# Altium PCB DUTBoard_NO_CAPS.PcbDoc (part 5 of 5)
Units mil, origin at the board's own origin, x right, y up, seen from the top; angles counter-clockwise.
Board outline 5475 x 5475 mil, 4 copper layers (Top Layer, Mid-Layer 1, Mid-Layer 2, Bottom Layer); 57 components, 471 nets, 1641 pads, 1070 vias.
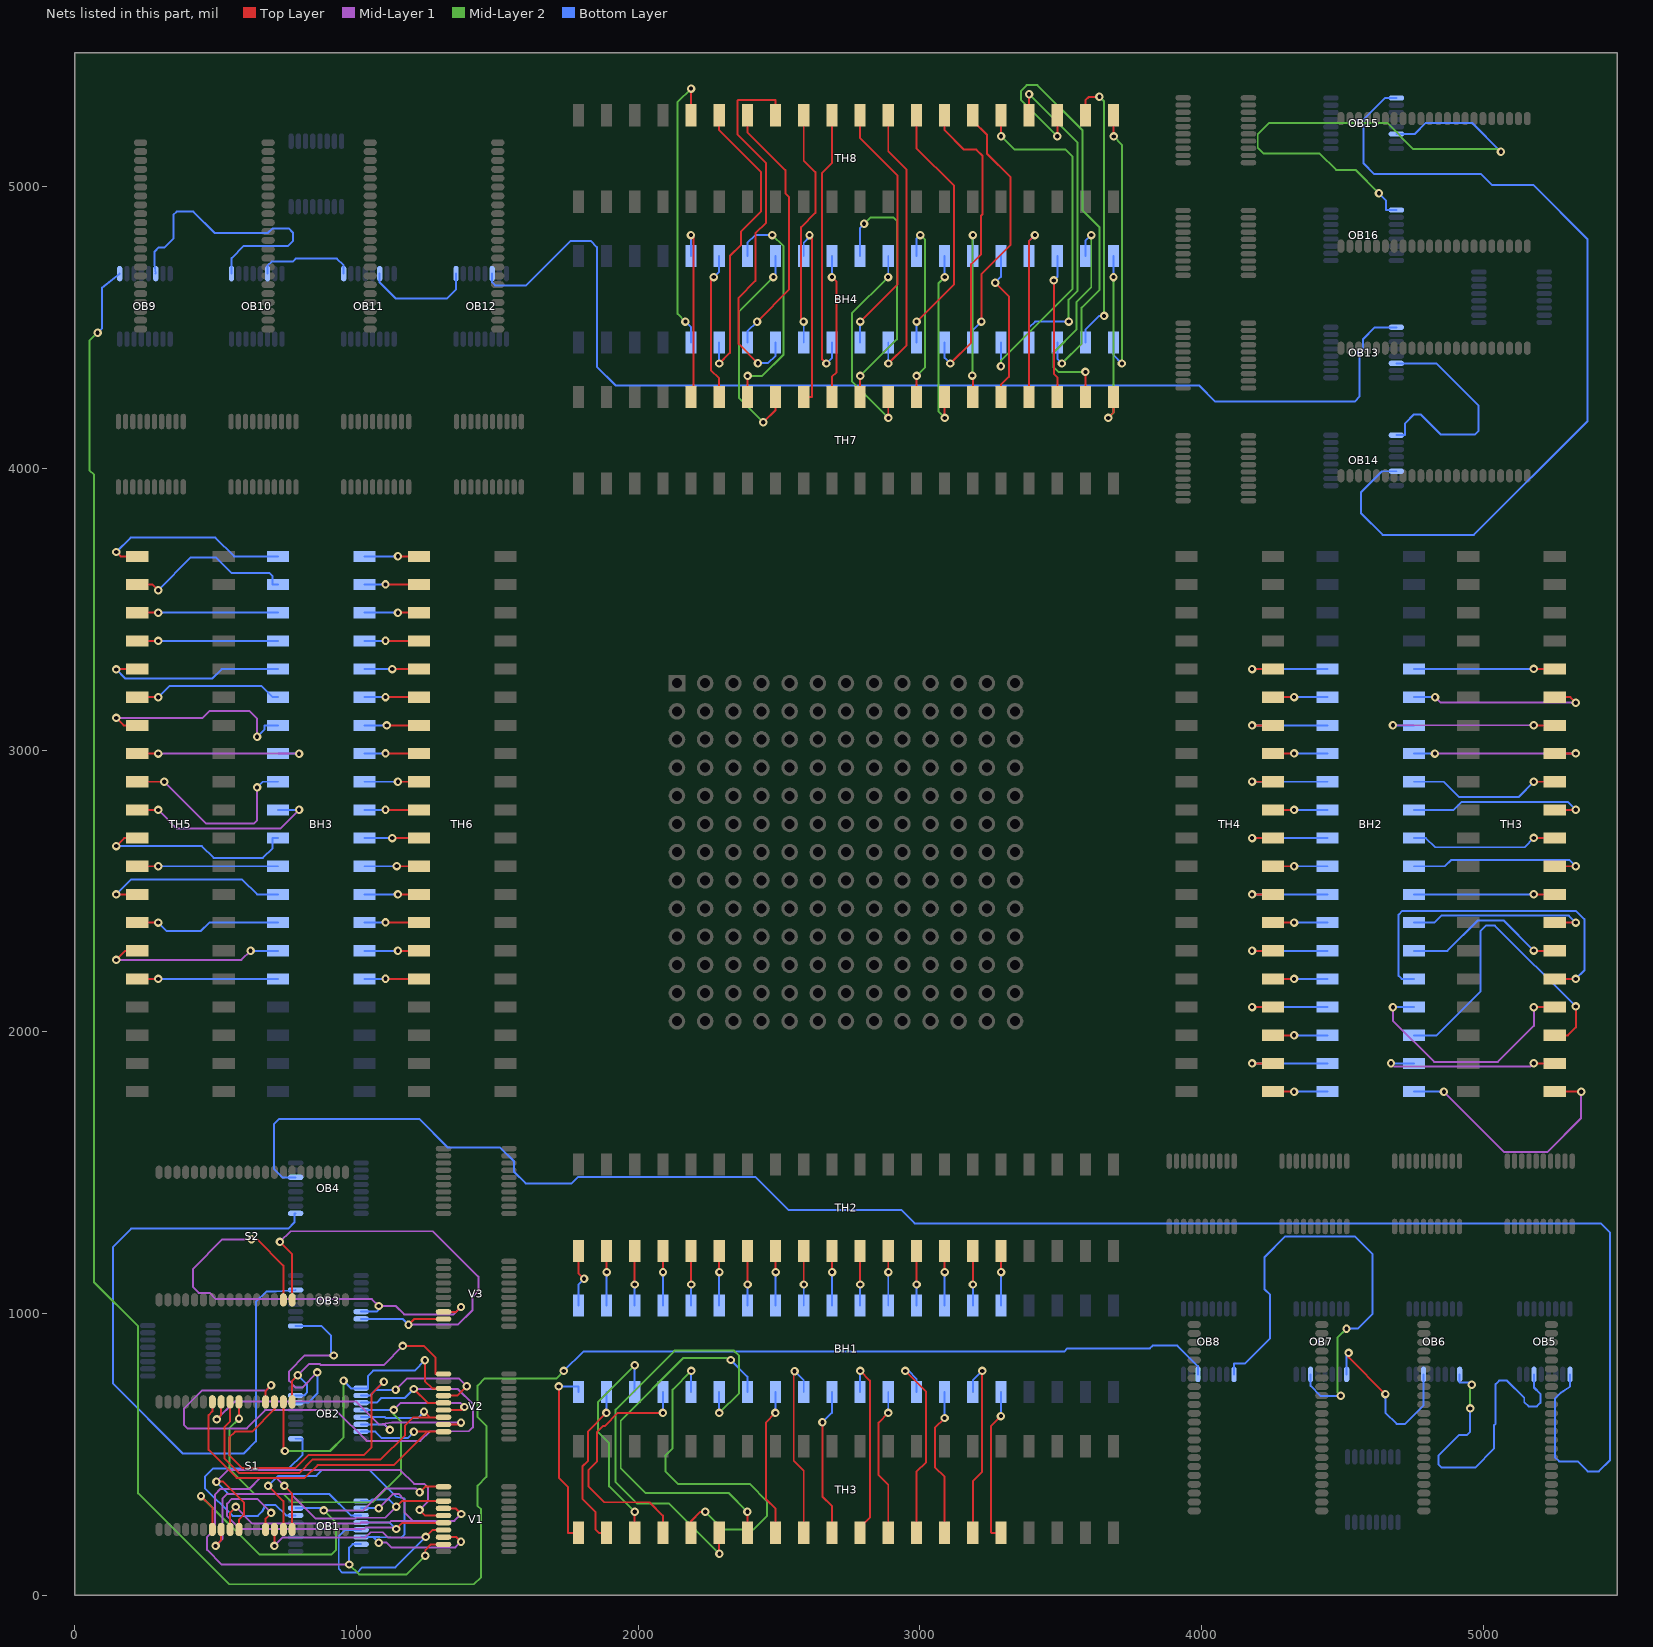
[diagram p7: the nets of this part, all layers, seen from the top]

## Via types
v1: diameter 30, hole 15, Top Layer to Bottom Layer, 1070 vias

## Nets (pads, with @x,y where several pads share a name; then routed paths per layer and width w, separated by ;. In a path a pad name is that pad's centre, name@x,y a point inside that pad or via, vN(x,y) a via of type N, cw(c..) or ccw(c..) an arc to the next point about the centre after c; other vN are vias at no path point) (continued)
OB_D_B110: OB3.D6 S2.DATA14 V3.OVL6 | length 1744.1
  Top Layer w7: v1(627.24,1263) 647.24,1263 740.24,1170 S2.DATA14@740.24,1048.62 ; V3.OVL6@1308.86,1006.02 1354.02,1006.02 v1(1371,1023)
  Mid-Layer 1 w7: v1(627.24,1263) 524,1263 419.77,1158.77 419.77,1093.35 440,1073.12 478.65,1073.12 500.77,1051 1054.32,1051 v1(1078.7,1026.61) 1139.39,1026.61 1169,997 1345,997 v1(1371,1023)
  Bottom Layer w7: OB3.D6@1016.14,1006.61 1071.93,1006.61 1085.32,1020 v1(1078.7,1026.61)
OB_D_B111: OB3.D7 S2.DATA15 V3.OVL7 | length 1716.4
  Top Layer w7: v1(728,1254) 771.73,1210.27 S2.DATA15@771.73,1048.62 ; v1(1184.59,960.43) 1204.59,980.43 V3.OVL7@1308.86,980.43
  Mid-Layer 1 w7: v1(728,1254) 766,1292 1271.2,1292 1432.5,1130.7 1432.5,1079.5 1412,1059 1412,1012.43 1360,960.43 v1(1184.59,960.43)
  Bottom Layer w7: OB3.D7@1016.14,981.02 1144,981.02 ; v1(1184.59,960.43) 1164.59,980.43 ; 1144,981.02 1164.59,980.43 ; 1144,981.02 1144.59,980.43 1164.59,980.43
OB_D_B112: OB2.D0 S1.DATA0 V2.OVL0 | length 862.2
  Top Layer w7: S1.DATA0@771.73,686.38 771.73,761 v1(791.73,781) ; v1(1164,885) 1239.5,885 1280,844.5 1280,785.16 V2.OVL0@1308.86,785.16
  Mid-Layer 1 w7: v1(791.73,781) 830.73,820 869.86,820 872.87,817 1096,817 v1(1164,885)
  Bottom Layer w7: OB2.D0@783.86,708.98 813.98,708.98 825,720 825,747.73 v1(791.73,781)
OB_D_B113: OB2.D1 S1.DATA1 V2.OVL1 | length 1122.9
  Top Layer w7: S1.DATA1@740.24,686.38 740.24,517.76 v1(746,512) ; v1(1243,834) 1243,760 1269.02,733.98 V2.OVL1@1308.86,733.98
  Mid-Layer 2 w7: v1(746,512) 906,512 954,560 v1(954,761)
  Bottom Layer w7: v1(954,761) 980.43,734.57 OB2.D1@1016.14,734.57 1040,734.57 1040,778 1059,797 1206,797 v1(1243,834)
OB_D_B114: OB2.D2 S1.DATA2 V2.OVL2 | length 1644.2
  Top Layer w7: S1.DATA2@708.74,686.38 708.74,660 629.24,580.5 569,580.5 548.5,560 548.5,497.18 594.68,451 782.69,451 829.72,498.03 1027.03,498.03 1053,524 1053,713.5 v1(1097.18,757.68) ; V2.OVL2@1308.86,708.39 1357.39,708.39 v1(1391,742)
  Mid-Layer 1 w7: v1(1138.7,728.98) 1178.7,768.98 1364.02,768.98 v1(1391,742)
  Bottom Layer w7: OB2.D2@1016.14,708.98 1048.47,708.98 1068.47,728.98 ; v1(1097.18,757.68) 1068.47,728.98 ; v1(1138.7,728.98) 1068.47,728.98
OB_D_B115: OB2.D3 S1.DATA3 V2.OVL3 | length 2239.7
  Top Layer w7: S1.DATA3@677.24,686.38 677.24,725.24 v1(697,745) ; v1(1203,732) 1252.2,682.8 V2.OVL3@1308.86,682.8
  Mid-Layer 1 w7: v1(697,745) 679,727 452,727 387,662 387,605 400,592 611,592 676,657 926.78,657 1035.78,548 1227,548 1261,582 1399,582 1413,596 1413,679 1360,732 v1(1203,732)
  Bottom Layer w7: OB2.D3@1016.14,683.39 1071.39,683.39 1088,700 1171,700 v1(1203,732)
OB_D_B116: OB2.D4 S1.DATA4 V2.OVL4 | length 1652.8
  Top Layer w7: S1.DATA4@582.76,686.38 582.76,627.24 v1(583,627) ; V2.OVL4@1308.86,657.2 1372,657.2 v1(1383,668.2)
  Mid-Layer 1 w7: v1(1132,657.8) 1157.2,683 1368.2,683 v1(1383,668.2)
  Mid-Layer 2 w7: v1(583,627) 548.5,592.5 548.5,448.19 638.19,358.5 742.5,358.5 770.97,330.03 1056.83,330.03 1158.5,431.7 1158.5,615.11 1132,641.61 v1(1132,657.8)
  Bottom Layer w7: OB2.D4@1016.14,657.8 v1(1132,657.8)
OB_D_B117: OB2.D5 S1.DATA5 V2.OVL5 | length 1373.5
  Top Layer w7: S1.DATA5@551.26,686.38 551.26,617.26 531,597 531,487 584.5,433.5 796.19,433.5 843.69,481 1085.07,481 1172.3,568.24 1172.3,603.21 1200.7,631.61 1260,631.61 ; v1(1239.61,652) 1260,631.61 ; V2.OVL5@1308.86,631.61 1260,631.61
  Bottom Layer w7: OB2.D5@1016.14,632.2 1100.59,632.2 1103.8,629 1216.61,629 v1(1239.61,652)
OB_D_B118: OB2.D6 S1.DATA6 V2.OVL6 | length 1219.9
  Top Layer w7: v1(504,624) 519.76,639.76 S1.DATA6@519.76,686.38 ; V2.OVL6@1308.86,606.02 1364.02,606.02 v1(1371,613)
  Mid-Layer 1 w7: v1(504,624) 567,687 998.32,687 1078.7,606.61 ; v1(1118.7,586.61) 1098.7,606.61 1078.7,606.61 ; v1(1371,613) 1125.09,613 1078.7,606.61
  Bottom Layer w7: OB2.D6@1016.14,606.61 1098.7,606.61 v1(1118.7,586.61)
OB_D_B119: OB2.D7 S1.DATA7 V2.OVL7 | length 1373.1
  Top Layer w7: S1.DATA7@488.27,686.38 488.27,652.5 475,639.23 475,515.7 574.2,416.5 816.19,416.5 861.69,462 1133,462 1251.43,580.43 ; v1(1204,580) 1204.43,580.43 1251.43,580.43 ; V2.OVL7@1308.86,580.43 1251.43,580.43
  Bottom Layer w7: OB2.D7@1016.14,581.02 1067.29,581.02 1090.31,558 1182,558 v1(1204,580)
OB_D_B120: OB1.D0 S1.DATA8 V1.OVL0 | length 1440.3
  Top Layer w7: v1(448,352) 488.27,311.73 S1.DATA8@488.27,233.62 ; v1(1224,365.16) 1244,385.16 V1.OVL0@1308.86,385.16
  Mid-Layer 1 w7: v1(883.87,301) 1024.57,301 1101.57,378 1211.16,378 v1(1224,365.16)
  Mid-Layer 2 w7: v1(448,352) 656,144 911,144 928,161 928,256.87 v1(883.87,301)
  Bottom Layer w7: OB1.D0@783.86,308.98 821.42,308.98 875.89,308.98 v1(883.87,301)
OB_D_B121: OB1.D1 S1.DATA9 V1.OVL1 | length 1235.8
  Top Layer w7: v1(499.76,175) 519.76,195 S1.DATA9@519.76,233.62 ; v1(1141.16,313.98) 1161.16,333.98 V1.OVL1@1308.86,333.98
  Mid-Layer 1 w7: v1(499.76,175) 524,199.24 524,342.76 540,358.76 767.8,358.76 854.56,272 996.61,272 999.61,275 1102.18,275 v1(1141.16,313.98)
  Bottom Layer w7: OB1.D1@1016.14,334.57 1049.7,334.57 1055.13,340 1115.13,340 v1(1141.16,313.98)
OB_D_B122: OB1.D2 S1.DATA10 V1.OVL2 | length 1269.4
  Top Layer w7: S1.DATA10@551.26,233.62 551.26,293.52 v1(571,313.26) ; V1.OVL2@1308.86,308.39 1351.42,308.39 v1(1371.42,288.39)
  Mid-Layer 1 w7: v1(571,313.26) 630.26,254 1012.61,254 1016.2,257.59 1117.59,257.59 1124,264 1200,264 ; v1(1079,308.98) 1130.02,360 1149.66,360 1170,339.66 1170,294 1200,264 ; v1(1371.42,288.39) 1347.03,264 1200,264
  Bottom Layer w7: OB1.D2@1016.14,308.98 v1(1079,308.98)
OB_D_B123: OB1.D3 S1.DATA11 V1.OVL3 | length 1771.1
  Top Layer w7: v1(502.76,403) 526.5,403 600,329.5 600,285 582.76,267.76 S1.DATA11@582.76,233.62 ; v1(1224,303) 1244.2,282.8 V1.OVL3@1308.86,282.8
  Mid-Layer 1 w7: v1(502.76,403) 543.78,444.03 1155.91,444.03 1204.5,395.43 1240,395.43 1253,382.43 1253,332 v1(1224,303)
  Bottom Layer w7: v1(502.76,403) 546.56,359.19 904.19,359.19 980,283.39 OB1.D3@1016.14,283.39
OB_D_B124: OB1.D4 S1.DATA12 V1.OVL4 | length 1229.2
  Top Layer w7: S1.DATA12@677.24,233.62 677.24,272.24 v1(697,292) ; v1(1141,235) 1163.2,257.2 V1.OVL4@1308.86,257.2
  Mid-Layer 1 w7: v1(697,292) 647.24,341.76 557.76,341.76 541,325 541,281 587,235 1027.61,235 1033.2,240.59 1135.41,240.59 v1(1141,235)
  Bottom Layer w7: OB1.D4@1016.14,257.8 1118.2,257.8 v1(1141,235)
OB_D_B125: OB1.D5 S1.DATA13 V1.OVL5 | length 1268.7
  Top Layer w7: v1(708.74,175) S1.DATA13@708.74,233.62 ; v1(1246,207) 1270.61,231.61 V1.OVL5@1308.86,231.61
  Mid-Layer 1 w7: v1(708.74,175) 738.74,205 1031.41,205 1050,223.59 1092.41,223.59 1111,205 1244,205 v1(1246,207)
  Bottom Layer w7: OB1.D5@1016.14,232.2 960,232.2 937,209.2 937,93.5 950,80.5 1002.63,80.5 1021.14,99 1138,99 v1(1246,207)
OB_D_B126: OB1.D6 S1.DATA14 V1.OVL6 | length 1416.8
  Top Layer w7: v1(686,388) 740.24,333.76 S1.DATA14@740.24,233.62 ; V1.OVL6@1308.86,206.02 1355,206.02 v1(1371,190.02)
  Mid-Layer 1 w7: v1(1078.7,186.61) 1107.39,186.61 1124,170 1350.98,170 v1(1371,190.02)
  Bottom Layer w7: v1(686,388) 722.03,424.03 857.72,424.03 878.69,445 1045.5,445 1139.42,351.08 1171,343 1171,216 1159,204 1082.39,206.61 1058.7,206.61 ; OB1.D6@1016.14,206.61 1053.7,206.61 1058.7,206.61 ; v1(1078.7,186.61) 1058.7,206.61
OB_D_B127: OB1.D7 S1.DATA15 V1.OVL7 | length 1694.6
  Top Layer w7: v1(744,388) 771.73,360.27 S1.DATA15@771.73,233.62 ; v1(1244,140) 1244,160 1264.43,180.43 V1.OVL7@1308.86,180.43
  Mid-Layer 1 w7: v1(744,388) 715,417 658.81,417 618.81,377 517,377 497,357 497,234 470,207 470,161 522,109 v1(974.13,109)
  Mid-Layer 2 w7: v1(974.13,109) 1009.13,74 1178,74 v1(1244,140)
  Bottom Layer w7: v1(974.13,109) 974.13,169 986.16,181.02 OB1.D7@1016.14,181.02
OUTSIDE_L_W0_U_BOTTOM_HEADER_WRP1: BH1.1 TH2.1 | length 209.9
  Top Layer w7: TH2.1@1787.5,1221.46 1787.5,1143.5 v1(1808,1123)
  Bottom Layer w7: BH1.1@1787.5,1028.54 1787.5,1102.5 v1(1808,1123)
OUTSIDE_L_W0_U_BOTTOM_HEADER_WRP2: BH2.1 TH4.1 | length 192.9
  Top Layer w7: TH4.1@4253.54,1787.5 v1(4328,1787.5)
  Bottom Layer w7: v1(4328,1787.5) BH2.1@4446.46,1787.5
OUTSIDE_L_W0_U_BOTTOM_HEADER_WRP3: BH3.1 TH6.1 | length 193.3
  Top Layer w7: v1(1147,3688) 1147.5,3687.5 TH6.1@1221.46,3687.5
  Bottom Layer w7: BH3.1@1028.54,3687.5 1146.5,3687.5 v1(1147,3688)
OUTSIDE_L_W0_U_BOTTOM_HEADER_WRP4: BH4.1 TH8.1 | length 980.4
  Top Layer w7: v1(3687.5,5178) TH8.1@3687.5,5253.54
  Mid-Layer 2 w7: v1(3687.5,5178) 3717,5148.5 v1(3717,4372)
  Bottom Layer w7: BH4.1@3687.5,4446.46 3687.5,4401.5 v1(3717,4372)
OUTSIDE_L_W1_U_BOTTOM_HEADER_WRP1: BH1.2 TH2.2 | length 193.3
  Top Layer w7: TH2.2@1887.5,1221.46 1887.5,1147.5 v1(1888,1147)
  Bottom Layer w7: BH1.2@1887.5,1028.54 1887.5,1146.5 v1(1888,1147)
OUTSIDE_L_W1_U_BOTTOM_HEADER_WRP2: BH2.2 TH4.2 | length 342
  Top Layer w7: v1(4179,1887.5) TH4.2@4253.54,1887.5
  Bottom Layer w7: v1(4179,1887.5) BH2.2@4446.46,1887.5
OUTSIDE_L_W1_U_BOTTOM_HEADER_WRP3: BH3.2 TH6.2 | length 193.3
  Top Layer w7: v1(1103,3588) 1103.5,3587.5 TH6.2@1221.46,3587.5
  Bottom Layer w7: BH3.2@1028.54,3587.5 1102.5,3587.5 v1(1103,3588)
OUTSIDE_L_W1_U_BOTTOM_HEADER_WRP4: BH4.2 TH8.2 | length 1023
  Top Layer w7: TH8.2@3587.5,5253.54 3587.5,5306 3600,5318.5 v1(3637,5318.5)
  Mid-Layer 2 w7: v1(3637,5318.5) 3653.5,5302 v1(3653.5,4541)
  Bottom Layer w7: BH4.2@3587.5,4446.46 3587.5,4491.5 3637,4541 v1(3653.5,4541)
OUTSIDE_L_W2_U_BOTTOM_HEADER_WRP1: BH1.3 TH2.3 | length 192.9
  Top Layer w7: v1(1987.5,1103) TH2.3@1987.5,1221.46
  Bottom Layer w7: BH1.3@1987.5,1028.54 v1(1987.5,1103)
OUTSIDE_L_W2_U_BOTTOM_HEADER_WRP2: BH2.3 TH4.3 | length 192.9
  Top Layer w7: TH4.3@4253.54,1987.5 v1(4328,1987.5)
  Bottom Layer w7: v1(4328,1987.5) BH2.3@4446.46,1987.5
OUTSIDE_L_W2_U_BOTTOM_HEADER_WRP3: BH3.3 TH6.3 | length 192.9
  Top Layer w7: v1(1147,3487.5) TH6.3@1221.46,3487.5
  Bottom Layer w7: BH3.3@1028.54,3487.5 v1(1147,3487.5)
OUTSIDE_L_W2_U_BOTTOM_HEADER_WRP4: BH4.3 TH8.3 | length 1571
  Top Layer w7: v1(3487.5,5179) TH8.3@3487.5,5253.54
  Mid-Layer 2 w7: v1(3487.5,5179) 3358,5308.5 3358,5339 3379,5360 3417,5360 3577,5200 3577,4916 3636.5,4856.5 3636.5,4632.5 3574,4570 3574,4442 v1(3504,4372)
  Bottom Layer w7: BH4.3@3487.5,4446.46 3487.5,4388.5 v1(3504,4372)
OUTSIDE_L_W3_U_BOTTOM_HEADER_WRP1: BH1.4 TH2.4 | length 193.3
  Top Layer w7: TH2.4@2087.5,1221.46 2087.5,1147.5 v1(2088,1147)
  Bottom Layer w7: BH1.4@2087.5,1028.54 2087.5,1146.5 v1(2088,1147)
OUTSIDE_L_W3_U_BOTTOM_HEADER_WRP2: BH2.4 TH4.4 | length 342
  Top Layer w7: v1(4179,2087.5) TH4.4@4253.54,2087.5
  Bottom Layer w7: v1(4179,2087.5) BH2.4@4446.46,2087.5
OUTSIDE_L_W3_U_BOTTOM_HEADER_WRP3: BH3.4 TH6.4 | length 193.3
  Top Layer w7: v1(1103,3388) 1103.5,3387.5 TH6.4@1221.46,3387.5
  Bottom Layer w7: BH3.4@1028.54,3387.5 1102.5,3387.5 v1(1103,3388)
OUTSIDE_L_W3_U_BOTTOM_HEADER_WRP4: BH4.4 TH8.4 | length 1168.9
  Top Layer w7: TH8.4@3387.5,5253.54 v1(3387.5,5328)
  Mid-Layer 2 w7: v1(3387.5,5328) 3560,5155.5 3560,4630.54 3528,4598.54 v1(3528,4521)
  Bottom Layer w7: BH4.4@3387.5,4446.46 3387.5,4500 3408.5,4521 v1(3528,4521)
OUTSIDE_L_W4_U_BOTTOM_HEADER_WRP1: BH1.5 TH2.5 | length 193.3
  Top Layer w7: TH2.5@2187.5,1221.46 2187.5,1103.5 v1(2188,1103)
  Bottom Layer w7: BH1.5@2187.5,1028.54 2187.5,1102.5 v1(2188,1103)
OUTSIDE_L_W4_U_BOTTOM_HEADER_WRP2: BH2.5 TH4.5 | length 192.9
  Top Layer w7: TH4.5@4253.54,2187.5 v1(4328,2187.5)
  Bottom Layer w7: v1(4328,2187.5) BH2.5@4446.46,2187.5
OUTSIDE_L_W4_U_BOTTOM_HEADER_WRP3: BH3.5 TH6.5 | length 192.9
  Top Layer w7: v1(1127,3287.5) TH6.5@1221.46,3287.5
  Bottom Layer w7: BH3.5@1028.54,3287.5 v1(1127,3287.5)
OUTSIDE_L_W4_U_BOTTOM_HEADER_WRP4: BH4.5 TH8.5 | length 1292
  Top Layer w7: TH8.5@3287.5,5253.54 3287.5,5179.5 v1(3288,5179)
  Mid-Layer 2 w7: v1(3287.5,4362) 3287.5,4382.5 3541,4636 3541,5107 3516,5132 3335,5132 v1(3288,5179)
  Bottom Layer w7: v1(3287.5,4362) BH4.5@3287.5,4446.46
OUTSIDE_L_W5_U_BOTTOM_HEADER_WRP1: BH1.6 TH2.6 | length 193.3
  Top Layer w7: TH2.6@2287.5,1221.46 2287.5,1147.5 v1(2288,1147)
  Bottom Layer w7: BH1.6@2287.5,1028.54 2287.5,1146.5 v1(2288,1147)
OUTSIDE_L_W5_U_BOTTOM_HEADER_WRP2: BH2.6 TH4.6 | length 342
  Top Layer w7: v1(4179,2287.5) TH4.6@4253.54,2287.5
  Bottom Layer w7: v1(4179,2287.5) BH2.6@4446.46,2287.5
OUTSIDE_L_W5_U_BOTTOM_HEADER_WRP3: BH3.6 TH6.6 | length 193.3
  Top Layer w7: v1(1103,3188) 1103.5,3187.5 TH6.6@1221.46,3187.5
  Bottom Layer w7: BH3.6@1028.54,3187.5 1102.5,3187.5 v1(1103,3188)
OUTSIDE_L_W5_U_BOTTOM_HEADER_WRP4: BH4.6 TH8.6 | length 918.5
  Top Layer w7: TH8.6@3187.5,5253.54 3187.5,5234 3238,5183.5 3238,5117 3322,5033 3322,4793.43 3218,4689.43 v1(3218,4521)
  Bottom Layer w7: BH4.6@3187.5,4446.46 3187.5,4490.5 v1(3218,4521)
OUTSIDE_L_W6_U_BOTTOM_HEADER_WRP1: BH1.7 TH2.7 | length 193.3
  Top Layer w7: TH2.7@2387.5,1221.46 2387.5,1103.5 v1(2388,1103)
  Bottom Layer w7: BH1.7@2387.5,1028.54 2387.5,1102.5 v1(2388,1103)
OUTSIDE_L_W6_U_BOTTOM_HEADER_WRP2: BH2.7 TH4.7 | length 192.9
  Top Layer w7: TH4.7@4253.54,2387.5 v1(4328,2387.5)
  Bottom Layer w7: v1(4328,2387.5) BH2.7@4446.46,2387.5
OUTSIDE_L_W6_U_BOTTOM_HEADER_WRP3: BH3.7 TH6.7 | length 192.9
  Top Layer w7: v1(1107,3087.5) TH6.7@1221.46,3087.5
  Bottom Layer w7: BH3.7@1028.54,3087.5 v1(1107,3087.5)
OUTSIDE_L_W6_U_BOTTOM_HEADER_WRP4: BH4.7 TH8.7 | length 1093
  Top Layer w7: TH8.7@3087.5,5253.54 3087.5,5200 3156.37,5131.13 3200,5131.13 3222,5109.13 3222,4902 3217,4897 3217,4760 3181.5,4724.5 3181.5,4446 v1(3107.5,4372)
  Bottom Layer w7: BH4.7@3087.5,4446.46 3087.5,4392 v1(3107.5,4372)
OUTSIDE_L_W7_U_BOTTOM_HEADER_WRP1: BH1.8 TH2.8 | length 193.3
  Top Layer w7: TH2.8@2487.5,1221.46 2487.5,1147.5 v1(2488,1147)
  Bottom Layer w7: BH1.8@2487.5,1028.54 2487.5,1146.5 v1(2488,1147)
OUTSIDE_L_W7_U_BOTTOM_HEADER_WRP2: BH2.8 TH4.8 | length 342
  Top Layer w7: v1(4179,2487.5) TH4.8@4253.54,2487.5
  Bottom Layer w7: v1(4179,2487.5) BH2.8@4446.46,2487.5
OUTSIDE_L_W7_U_BOTTOM_HEADER_WRP3: BH3.8 TH6.8 | length 193.3
  Top Layer w7: v1(1103,2988) 1103.5,2987.5 TH6.8@1221.46,2987.5
  Bottom Layer w7: BH3.8@1028.54,2987.5 1102.5,2987.5 v1(1103,2988)
OUTSIDE_L_W7_U_BOTTOM_HEADER_WRP4: BH4.8 TH8.8 | length 917.7
  Top Layer w7: TH8.8@2987.5,5253.54 2987.5,5136 3121,5002.5 3121,4654 v1(2988,4521)
  Bottom Layer w7: BH4.8@2987.5,4446.46 2987.5,4520.5 v1(2988,4521)
OUTSIDE_L_W8_U_BOTTOM_HEADER_WRP1: BH1.9 TH2.9 | length 193.3
  Top Layer w7: TH2.9@2587.5,1221.46 2587.5,1103.5 v1(2588,1103)
  Bottom Layer w7: BH1.9@2587.5,1028.54 2587.5,1102.5 v1(2588,1103)
OUTSIDE_L_W8_U_BOTTOM_HEADER_WRP2: BH2.9 TH4.9 | length 192.9
  Top Layer w7: TH4.9@4253.54,2587.5 v1(4328,2587.5)
  Bottom Layer w7: v1(4328,2587.5) BH2.9@4446.46,2587.5
OUTSIDE_L_W8_U_BOTTOM_HEADER_WRP3: BH3.9 TH6.9 | length 192.9
  Top Layer w7: v1(1147,2887.5) TH6.9@1221.46,2887.5
  Bottom Layer w7: BH3.9@1028.54,2887.5 v1(1147,2887.5)
OUTSIDE_L_W8_U_BOTTOM_HEADER_WRP4: BH4.9 TH8.9 | length 1010.3
  Top Layer w7: TH8.9@2887.5,5253.54 2887.5,5126 2953,5060.5 2953,4437 v1(2888,4372)
  Bottom Layer w7: BH4.9@2887.5,4446.46 2887.5,4372.5 v1(2888,4372)
OUTSIDE_L_W9_U_BOTTOM_HEADER_WRP1: BH1.10 TH2.10 | length 193.3
  Top Layer w7: TH2.10@2687.5,1221.46 2687.5,1147.5 v1(2688,1147)
  Bottom Layer w7: BH1.10@2687.5,1028.54 2687.5,1146.5 v1(2688,1147)
OUTSIDE_L_W9_U_BOTTOM_HEADER_WRP2: BH2.10 TH4.10 | length 342
  Top Layer w7: v1(4179,2687.5) TH4.10@4253.54,2687.5
  Bottom Layer w7: v1(4179,2687.5) BH2.10@4446.46,2687.5
OUTSIDE_L_W9_U_BOTTOM_HEADER_WRP3: BH3.10 TH6.10 | length 193.3
  Top Layer w7: v1(1103,2788) 1103.5,2787.5 TH6.10@1221.46,2787.5
  Bottom Layer w7: BH3.10@1028.54,2787.5 1102.5,2787.5 v1(1103,2788)
OUTSIDE_L_W9_U_BOTTOM_HEADER_WRP4: BH4.10 TH8.10 | length 917.7
  Top Layer w7: TH8.10@2787.5,5253.54 2787.5,5172 2921,5038.5 2921,4654 v1(2788,4521)
  Bottom Layer w7: BH4.10@2787.5,4446.46 2787.5,4520.5 v1(2788,4521)
OUTSIDE_L_W10_U_BOTTOM_HEADER_WRP1: BH1.11 TH2.11 | length 193.3
  Top Layer w7: TH2.11@2787.5,1221.46 2787.5,1103.5 v1(2788,1103)
  Bottom Layer w7: BH1.11@2787.5,1028.54 2787.5,1102.5 v1(2788,1103)
OUTSIDE_L_W10_U_BOTTOM_HEADER_WRP2: BH2.11 TH4.11 | length 192.9
  Top Layer w7: TH4.11@4253.54,2787.5 v1(4328,2787.5)
  Bottom Layer w7: v1(4328,2787.5) BH2.11@4446.46,2787.5
OUTSIDE_L_W10_U_BOTTOM_HEADER_WRP3: BH3.11 TH6.11 | length 192.9
  Top Layer w7: v1(1127,2687.5) TH6.11@1221.46,2687.5
  Bottom Layer w7: BH3.11@1028.54,2687.5 v1(1127,2687.5)
OUTSIDE_L_W10_U_BOTTOM_HEADER_WRP4: BH4.11 TH8.11 | length 984.6
  Top Layer w7: v1(2668,4372) 2653,4387 2653,5048.5 2687.5,5083 TH8.11@2687.5,5253.54
  Bottom Layer w7: v1(2668,4372) 2687.5,4391.5 BH4.11@2687.5,4446.46
OUTSIDE_L_W11_U_BOTTOM_HEADER_WRP1: BH1.12 TH2.12 | length 193.3
  Top Layer w7: TH2.12@2887.5,1221.46 2887.5,1147.5 v1(2888,1147)
  Bottom Layer w7: BH1.12@2887.5,1028.54 2887.5,1146.5 v1(2888,1147)
OUTSIDE_L_W11_U_BOTTOM_HEADER_WRP2: BH2.12 TH4.12 | length 342.4
  Top Layer w7: v1(4179,2888) 4179.5,2887.5 TH4.12@4253.54,2887.5
  Bottom Layer w7: v1(4179,2888) 4179.5,2887.5 BH2.12@4446.46,2887.5
OUTSIDE_L_W11_U_BOTTOM_HEADER_WRP3: BH3.12 TH6.12 | length 193.3
  Top Layer w7: v1(1143,2588) 1143.5,2587.5 TH6.12@1221.46,2587.5
  Bottom Layer w7: BH3.12@1028.54,2587.5 1142.5,2587.5 v1(1143,2588)
OUTSIDE_L_W11_U_BOTTOM_HEADER_WRP4: BH4.12 TH8.12 | length 849
  Top Layer w7: v1(2587,4521) 2578,4530 2578,4856 2628.64,4906.64 2628.64,5051.36 2587.5,5092.5 TH8.12@2587.5,5253.54
  Bottom Layer w7: v1(2587,4521) 2587.5,4520.5 BH4.12@2587.5,4446.46
OUTSIDE_L_W12_U_BOTTOM_HEADER_WRP1: BH1.13 TH2.13 | length 193.3
  Top Layer w7: TH2.13@2987.5,1221.46 2987.5,1103.5 v1(2988,1103)
  Bottom Layer w7: BH1.13@2987.5,1028.54 2987.5,1102.5 v1(2988,1103)
OUTSIDE_L_W12_U_BOTTOM_HEADER_WRP2: BH2.13 TH4.13 | length 193.3
  Top Layer w7: TH4.13@4253.54,2987.5 4327.5,2987.5 v1(4328,2988)
  Bottom Layer w7: v1(4328,2988) 4328.5,2987.5 BH2.13@4446.46,2987.5
OUTSIDE_L_W12_U_BOTTOM_HEADER_WRP3: BH3.13 TH6.13 | length 192.9
  Top Layer w7: v1(1147,2487.5) TH6.13@1221.46,2487.5
  Bottom Layer w7: BH3.13@1028.54,2487.5 v1(1147,2487.5)
OUTSIDE_L_W12_U_BOTTOM_HEADER_WRP4: BH4.13 TH8.13 | length 1353
  Top Layer w7: v1(2425,4373) 2356.46,4441.54 2356.46,4605.46 2416,4665 2416,4834 2454,4872 2454,5083 2352,5185 2352,5305 2354,5307 2487.5,5307 TH8.13@2487.5,5253.54
  Bottom Layer w7: v1(2425,4373) 2460.5,4373 2487.5,4400 BH4.13@2487.5,4446.46
OUTSIDE_L_W13_U_BOTTOM_HEADER_WRP1: BH1.14 TH2.14 | length 193.3
  Top Layer w7: TH2.14@3087.5,1221.46 3087.5,1147.5 v1(3088,1147)
  Bottom Layer w7: BH1.14@3087.5,1028.54 3087.5,1146.5 v1(3088,1147)
OUTSIDE_L_W13_U_BOTTOM_HEADER_WRP2: BH2.14 TH4.14 | length 342
  Top Layer w7: v1(4179,3087.5) TH4.14@4253.54,3087.5
  Bottom Layer w7: v1(4179,3087.5) BH2.14@4446.46,3087.5
OUTSIDE_L_W13_U_BOTTOM_HEADER_WRP3: BH3.14 TH6.14 | length 193.3
  Top Layer w7: v1(1103,2388) 1103.5,2387.5 TH6.14@1221.46,2387.5
  Bottom Layer w7: BH3.14@1028.54,2387.5 1102.5,2387.5 v1(1103,2388)
OUTSIDE_L_W13_U_BOTTOM_HEADER_WRP4: BH4.14 TH8.14 | length 930.1
  Top Layer w7: TH8.14@2387.5,5253.54 2387.5,5192.96 2522,5058.46 2522,4976 2536,4962 2536,4634.82 v1(2421.68,4520.5)
  Bottom Layer w7: BH4.14@2387.5,4446.46 2387.5,4486.32 v1(2421.68,4520.5)
OUTSIDE_L_W14_U_BOTTOM_HEADER_WRP1: BH1.15 TH2.15 | length 193.3
  Top Layer w7: TH2.15@3187.5,1221.46 3187.5,1103.5 v1(3188,1103)
  Bottom Layer w7: BH1.15@3187.5,1028.54 3187.5,1102.5 v1(3188,1103)
OUTSIDE_L_W14_U_BOTTOM_HEADER_WRP2: BH2.15 TH4.15 | length 193.3
  Top Layer w7: TH4.15@4253.54,3187.5 4327.5,3187.5 v1(4328,3188)
  Bottom Layer w7: v1(4328,3188) 4328.5,3187.5 BH2.15@4446.46,3187.5
OUTSIDE_L_W14_U_BOTTOM_HEADER_WRP3: BH3.15 TH6.15 | length 192.9
  Top Layer w7: v1(1147,2287.5) TH6.15@1221.46,2287.5
  Bottom Layer w7: BH3.15@1028.54,2287.5 v1(1147,2287.5)
OUTSIDE_L_W14_U_BOTTOM_HEADER_WRP4: BH4.15 TH8.15 | length 1079
  Top Layer w7: v1(2287.5,4372) 2325.63,4410.13 2325.63,4753.63 2365,4793 2365,4841.42 2436,4912.42 2436,5051.5 2287.5,5200 TH8.15@2287.5,5253.54
  Bottom Layer w7: v1(2287.5,4372) BH4.15@2287.5,4446.46
OUTSIDE_L_W15_U_BOTTOM_HEADER_WRP1: BH1.16 TH2.16 | length 193.3
  Top Layer w7: TH2.16@3287.5,1221.46 3287.5,1147.5 v1(3288,1147)
  Bottom Layer w7: BH1.16@3287.5,1028.54 3287.5,1146.5 v1(3288,1147)
OUTSIDE_L_W15_U_BOTTOM_HEADER_WRP2: BH2.16 TH4.16 | length 342
  Top Layer w7: v1(4179,3287.5) TH4.16@4253.54,3287.5
  Bottom Layer w7: v1(4179,3287.5) BH2.16@4446.46,3287.5
OUTSIDE_L_W15_U_BOTTOM_HEADER_WRP3: BH3.16 TH6.16 | length 193.3
  Top Layer w7: v1(1103,2188) 1103.5,2187.5 TH6.16@1221.46,2187.5
  Bottom Layer w7: BH3.16@1028.54,2187.5 1102.5,2187.5 v1(1103,2188)
OUTSIDE_L_W15_U_BOTTOM_HEADER_WRP4: BH4.16 TH8.16 | length 1035.4
  Top Layer w7: TH8.16@2187.5,5253.54 v1(2187.5,5348)
  Mid-Layer 2 w7: v1(2167.5,4521) 2140,4548.5 2140,5300.5 v1(2187.5,5348)
  Bottom Layer w7: v1(2167.5,4521) 2187.5,4501 BH4.16@2187.5,4446.46
OUTSIDE_R_W0_U_BOTTOM_HEADER_WRP1: BH1.40 TH3.1@1787.5,221.46 | length 659.7
  Top Layer w7: v1(1718,741) 1718,417 1751,384 1751,221 1787.5,221 TH3.1@1787.5,221.46
  Bottom Layer w7: v1(1718,741) 1787.5,741 BH1.40@1787.5,721.46
OUTSIDE_R_W0_U_BOTTOM_HEADER_WRP2: BH2.40 TH3.1@5253.54,1787.5 | length 919.1
  Top Layer w7: TH3.1@5253.54,1787.5 5346.5,1787.5 v1(5347,1787)
  Mid-Layer 1 w7: v1(4860,1787.5) 5074.5,1573 5226,1573 5347,1694 v1(5347,1787)
  Bottom Layer w7: BH2.40@4753.54,1787.5 v1(4860,1787.5)
OUTSIDE_R_W0_U_BOTTOM_HEADER_WRP3: BH3.40 TH5.1 | length 704
  Top Layer w7: v1(147,3703) 162.5,3687.5 TH5.1@221.46,3687.5
  Bottom Layer w7: v1(147,3703) 198,3754 498.92,3754 565.42,3687.5 BH3.40@721.46,3687.5
OUTSIDE_R_W0_U_BOTTOM_HEADER_WRP4: BH4.40 TH7.1 | length 665.2
  Top Layer w7: v1(3668,4179) 3687.5,4198.5 TH7.1@3687.5,4253.54
  Mid-Layer 2 w7: v1(3668,4179) 3687,4198 v1(3687,4679)
  Bottom Layer w7: v1(3687,4679) 3687.5,4679.5 BH4.40@3687.5,4753.54
OUTSIDE_R_W1_U_BOTTOM_HEADER_WRP1: BH1.39 TH3.2@1887.5,221.46 | length 586.9
  Top Layer w7: v1(1887,647) 1821,581 1821,475.99 1802,456.99 1802,342 1849,295 1849,232.46 1860,221.46 TH3.2@1887.5,221.46
  Bottom Layer w7: v1(1887,647) 1887.5,647.5 BH1.39@1887.5,721.46
OUTSIDE_R_W1_U_BOTTOM_HEADER_WRP2: BH2.39 TH3.2@5253.54,1887.5 | length 673.4
  Top Layer w7: v1(5179,1888) 5179.5,1887.5 TH3.2@5253.54,1887.5
  Mid-Layer 1 w7: v1(4672,1888) 4684,1876 5167,1876 v1(5179,1888)
  Bottom Layer w7: v1(4672,1888) 4672.5,1887.5 BH2.39@4753.54,1887.5
OUTSIDE_R_W1_U_BOTTOM_HEADER_WRP3: BH3.39 TH5.2 | length 613.4
  Top Layer w7: TH5.2@221.46,3587.5 276,3587.5 v1(296,3567.5)
  Bottom Layer w7: v1(296,3567.5) 412.09,3683.59 500.91,3683.59 555.5,3629 690,3629 702,3617 702,3587.5 BH3.39@721.46,3587.5
OUTSIDE_R_W1_U_BOTTOM_HEADER_WRP4: BH4.39 TH7.2 | length 816.4
  Top Layer w7: TH7.2@3587.5,4253.54 v1(3587.5,4342)
  Mid-Layer 2 w7: v1(3587.5,4342) 3491,4342 3474,4359 3474,4410.5 3556.5,4493 3556.5,4590.5 3608,4642 v1(3608,4828)
  Bottom Layer w7: BH4.39@3587.5,4753.54 3587.5,4807.5 v1(3608,4828)
OUTSIDE_R_W2_U_BOTTOM_HEADER_WRP1: BH1.38 TH3.3@1987.5,221.46 | length 797.6
  Top Layer w7: TH3.3@1987.5,221.46 v1(1987.5,296)
  Mid-Layer 2 w7: v1(1987.5,296) 1897,386.5 1897,540 1857,580 1857,685 v1(1988,816)
  Bottom Layer w7: BH1.38@1987.5,721.46 1987.5,815.5 v1(1988,816)
OUTSIDE_R_W2_U_BOTTOM_HEADER_WRP2: BH2.38 TH3.3@5253.54,1987.5 | length 1140.9
  Top Layer w7: TH3.3@5253.54,1987.5 5300,1987.5 5328,2015.5 v1(5328,2090)
  Bottom Layer w7: BH2.38@4753.54,1987.5 4834,1987.5 4990,2143.5 4990,2358 5009,2377 5041,2377 v1(5328,2090)
OUTSIDE_R_W2_U_BOTTOM_HEADER_WRP3: BH3.38 TH5.3 | length 500
  Top Layer w7: TH5.3@221.46,3487.5 v1(296,3487.5)
  Bottom Layer w7: v1(296,3487.5) BH3.38@721.46,3487.5
OUTSIDE_R_W2_U_BOTTOM_HEADER_WRP4: BH4.38 TH7.3 | length 510.4
  Top Layer w7: v1(3475,4667) 3475,4335.5 3487.5,4323 TH7.3@3487.5,4253.54
  Bottom Layer w7: v1(3475,4667) 3487.5,4679.5 BH4.38@3487.5,4753.54
OUTSIDE_R_W3_U_BOTTOM_HEADER_WRP1: BH1.37 TH3.4@2087.5,221.46 | length 909.1
  Top Layer w7: TH3.4@2087.5,221.46 2087.5,282.5 2040,330 1880,330 1824.32,385.68 1824.32,445.3 1854,474.99 1854,579.69 1874.31,600 1881,600 1928,647 v1(2087.5,647)
  Bottom Layer w7: v1(2087.5,647) BH1.37@2087.5,721.46
OUTSIDE_R_W3_U_BOTTOM_HEADER_WRP2: BH2.37 TH3.4@5253.54,2087.5 | length 877
  Top Layer w7: v1(5179,2087) 5179.5,2087.5 TH3.4@5253.54,2087.5
  Mid-Layer 1 w7: v1(4679,2087) 4679,2039 4825,1893 5051,1893 5179,2021 v1(5179,2087)
  Bottom Layer w7: v1(4679,2087) 4679.5,2087.5 BH2.37@4753.54,2087.5
OUTSIDE_R_W3_U_BOTTOM_HEADER_WRP3: BH3.37 TH5.4 | length 500
  Top Layer w7: TH5.4@221.46,3387.5 v1(296,3387.5)
  Bottom Layer w7: v1(296,3387.5) BH3.37@721.46,3387.5
OUTSIDE_R_W3_U_BOTTOM_HEADER_WRP4: BH4.37 TH7.4 | length 665.9
  Top Layer w7: TH7.4@3387.5,4253.54 3387.5,4807.5 v1(3408,4828)
  Bottom Layer w7: BH4.37@3387.5,4753.54 3387.5,4807.5 v1(3408,4828)
OUTSIDE_R_W4_U_BOTTOM_HEADER_WRP1: BH1.36 TH3.5@2187.5,221.46 | length 1298
  Top Layer w7: TH3.5@2187.5,221.46 2187.5,263.5 2220,296 v1(2238,296)
  Mid-Layer 2 w7: v1(2188,796) 2122,730 2122,522 2096,496 2096,439.5 2141.5,394 2397,394 2457,334 2457,281 2409,233 2301,233 v1(2238,296)
  Bottom Layer w7: BH1.36@2187.5,721.46 2187.5,795.5 v1(2188,796)
OUTSIDE_R_W4_U_BOTTOM_HEADER_WRP2: BH2.36 TH3.5@5253.54,2187.5 | length 1252.8
  Top Layer w7: TH3.5@5253.54,2187.5 v1(5328,2187.5)
  Bottom Layer w7: BH2.36@4753.54,2187.5 4710,2187.5 4699,2198.5 4699,2416 4712.5,2429.5 5328.5,2429.5 5358,2400 5358,2217.5 v1(5328,2187.5)
OUTSIDE_R_W4_U_BOTTOM_HEADER_WRP3: BH3.36 TH5.5 | length 676.7
  Top Layer w7: v1(147,3286) 148.5,3287.5 TH5.5@221.46,3287.5
  Bottom Layer w7: v1(147,3286) 179,3254 488,3254 521.5,3287.5 BH3.36@721.46,3287.5
OUTSIDE_R_W4_U_BOTTOM_HEADER_WRP4: BH4.36 TH7.5 | length 540.6
  Top Layer w7: v1(3267,4659) 3316,4610 3316,4324.5 3287.5,4296 TH7.5@3287.5,4253.54
  Bottom Layer w7: v1(3267,4659) 3287.5,4679.5 BH4.36@3287.5,4753.54
OUTSIDE_R_W5_U_BOTTOM_HEADER_WRP1: BH1.35 TH3.6@2287.5,221.46 | length 1644.6
  Top Layer w7: TH3.6@2287.5,221.46 2287.5,147.5 v1(2288,147)
  Mid-Layer 2 w7: v1(2287.5,647) 2358,717.5 2358,850 2340,868 2129,868 1920,659 1920,401 1996,325 2110,325 v1(2288,147)
  Bottom Layer w7: v1(2287.5,647) BH1.35@2287.5,721.46
OUTSIDE_R_W5_U_BOTTOM_HEADER_WRP2: BH2.35 TH3.6@5253.54,2287.5 | length 589.1
  Top Layer w7: v1(5179,2288) 5179.5,2287.5 TH3.6@5253.54,2287.5
  Bottom Layer w7: BH2.35@4753.54,2287.5 4872,2287.5 4979.5,2395 5072,2395 v1(5179,2288)
OUTSIDE_R_W5_U_BOTTOM_HEADER_WRP3: BH3.35 TH5.6 | length 533.6
  Top Layer w7: TH5.6@221.46,3187.5 v1(296,3187.5)
  Bottom Layer w7: v1(296,3187.5) 336.5,3228 661.5,3228 702,3187.5 BH3.35@721.46,3187.5
OUTSIDE_R_W5_U_BOTTOM_HEADER_WRP4: BH4.35 TH7.6 | length 650.6
  Top Layer w7: v1(3185.97,4329.03) 3187.5,4327.5 TH7.6@3187.5,4253.54
  Mid-Layer 2 w7: v1(3185.97,4329.03) 3185.97,4825.97 v1(3188,4828)
  Bottom Layer w7: BH4.35@3187.5,4753.54 3187.5,4827.5 v1(3188,4828)
OUTSIDE_R_W6_U_BOTTOM_HEADER_WRP1: BH1.34 TH3.7@2387.5,221.46 | length 1381.2
  Top Layer w7: TH3.7@2387.5,221.46 v1(2387.5,296)
  Mid-Layer 2 w7: v1(2328.5,835) 2321.5,842 2160,842 1938,620 1938,450 2025,363 2320.5,363 v1(2387.5,296)
  Bottom Layer w7: v1(2328.5,835) 2387.5,776 BH1.34@2387.5,721.46
OUTSIDE_R_W6_U_BOTTOM_HEADER_WRP2: BH2.34 TH3.7@5253.54,2387.5 | length 669.6
  Top Layer w7: TH3.7@5253.54,2387.5 v1(5328,2387.5)
  Bottom Layer w7: BH2.34@4753.54,2387.5 4826,2387.5 4851,2412.5 5303,2412.5 v1(5328,2387.5)
OUTSIDE_R_W6_U_BOTTOM_HEADER_WRP3: BH3.34 TH5.7 | length 770.5
  Top Layer w7: v1(147,3114) 173.5,3087.5 TH5.7@221.46,3087.5
  Mid-Layer 1 w7: v1(147,3114) 454,3114 479,3139 619,3139 647,3111 v1(647,3047)
  Bottom Layer w7: v1(647,3047) 674,3074 674,3087.5 BH3.34@721.46,3087.5
OUTSIDE_R_W6_U_BOTTOM_HEADER_WRP4: BH4.34 TH7.7 | length 668.6
  Top Layer w7: TH7.7@3087.5,4253.54 3087.5,4179.5 v1(3088,4179)
  Mid-Layer 2 w7: v1(3088,4179) 3065,4202 3065,4656 v1(3088,4679)
  Bottom Layer w7: BH4.34@3087.5,4753.54 3087.5,4679.5 v1(3088,4679)
OUTSIDE_R_W7_U_BOTTOM_HEADER_WRP1: BH1.33 TH3.8@2487.5,221.46 | length 528.6
  Top Layer w7: v1(2487,647) 2453,613 2453,341.5 2487.5,307 TH3.8@2487.5,221.46
  Bottom Layer w7: v1(2487,647) 2487.5,647.5 BH1.33@2487.5,721.46
OUTSIDE_R_W7_U_BOTTOM_HEADER_WRP2: BH2.33 TH3.8@5253.54,2487.5 | length 500.4
  Top Layer w7: v1(5179,2488) 5179.5,2487.5 TH3.8@5253.54,2487.5
  Bottom Layer w7: BH2.33@4753.54,2487.5 5178.5,2487.5 v1(5179,2488)
OUTSIDE_R_W7_U_BOTTOM_HEADER_WRP3: BH3.33 TH5.8 | length 649.5
  Top Layer w7: TH5.8@221.46,2987.5 v1(296,2987.5)
  Mid-Layer 1 w7: v1(296,2987.5) 296.5,2987 v1(796,2987)
  Bottom Layer w7: BH3.33@721.46,2987.5 795.5,2987.5 v1(796,2987)
OUTSIDE_R_W7_U_BOTTOM_HEADER_WRP4: BH4.33 TH7.8 | length 674.2
  Top Layer w7: TH7.8@2987.5,4253.54 2987.5,4327.5 v1(2988,4328)
  Mid-Layer 2 w7: v1(2988,4328) 3018,4358 3018,4811 v1(3001,4828)
  Bottom Layer w7: BH4.33@2987.5,4753.54 2987.5,4814.5 v1(3001,4828)
OUTSIDE_R_W8_U_BOTTOM_HEADER_WRP1: BH1.32 TH3.9@2587.5,221.46 | length 676.5
  Top Layer w7: v1(2555,795) 2552,792 2552,477 2587.5,441.5 TH3.9@2587.5,221.46
  Bottom Layer w7: v1(2555,795) 2587.5,762.5 BH1.32@2587.5,721.46
OUTSIDE_R_W8_U_BOTTOM_HEADER_WRP2: BH2.32 TH3.9@5253.54,2587.5 | length 666.7
  Top Layer w7: TH3.9@5253.54,2587.5 v1(5328,2587.5)
  Bottom Layer w7: BH2.32@4753.54,2587.5 4863.5,2587.5 4885,2609 5306.5,2609 v1(5328,2587.5)
OUTSIDE_R_W8_U_BOTTOM_HEADER_WRP3: BH3.32 TH5.9 | length 691
  Top Layer w7: TH5.9@221.46,2887.5 v1(318,2887.5)
  Mid-Layer 1 w7: v1(318,2887.5) 466.5,2739 634.5,2739 647,2751.5 v1(647,2867.5)
  Bottom Layer w7: v1(647,2867.5) 667,2887.5 BH3.32@721.46,2887.5
OUTSIDE_R_W8_U_BOTTOM_HEADER_WRP4: BH4.32 TH7.9 | length 756.8
  Top Layer w7: TH7.9@2887.5,4253.54 2887.5,4179.5 v1(2888,4179)
  Mid-Layer 2 w7: v1(2887,4679) 2758,4550 2758,4309 v1(2888,4179)
  Bottom Layer w7: v1(2887,4679) 2887.5,4679.5 BH4.32@2887.5,4753.54
OUTSIDE_R_W9_U_BOTTOM_HEADER_WRP1: BH1.31 TH3.10@2687.5,221.46 | length 527.8
  Top Layer w7: v1(2654,614) 2654,350.5 2687.5,317 TH3.10@2687.5,221.46
  Bottom Layer w7: v1(2654,614) 2687.5,647.5 BH1.31@2687.5,721.46
OUTSIDE_R_W9_U_BOTTOM_HEADER_WRP2: BH2.31 TH3.10@5253.54,2687.5 | length 527.3
  Top Layer w7: v1(5179,2688) 5179.5,2687.5 TH3.10@5253.54,2687.5
  Bottom Layer w7: BH2.31@4753.54,2687.5 4796,2687.5 4828.5,2655 5146,2655 v1(5179,2688)
OUTSIDE_R_W9_U_BOTTOM_HEADER_WRP3: BH3.31 TH5.10 | length 704.6
  Top Layer w7: TH5.10@221.46,2787.5 v1(296,2787.5)
  Mid-Layer 1 w7: v1(296,2787.5) 362.5,2721 729,2721 v1(796,2788)
  Bottom Layer w7: BH3.31@721.46,2787.5 795.5,2787.5 v1(796,2788)
OUTSIDE_R_W9_U_BOTTOM_HEADER_WRP4: BH4.31 TH7.10 | length 929.7
  Top Layer w7: TH7.10@2787.5,4253.54 2787.5,4327.5 v1(2788,4328)
  Mid-Layer 2 w7: v1(2788,4328) 2918,4458 2918,4879 2907,4890 2823.88,4890 v1(2801.88,4868)
  Bottom Layer w7: BH4.31@2787.5,4753.54 2787.5,4853.62 v1(2801.88,4868)
OUTSIDE_R_W10_U_BOTTOM_HEADER_WRP1: BH1.30 TH3.11@2787.5,221.46 | length 677.7
  Top Layer w7: TH3.11@2787.5,221.46 2787.5,241 2822,275.5 2822,762 v1(2788,796)
  Bottom Layer w7: BH1.30@2787.5,721.46 2787.5,795.5 v1(2788,796)
OUTSIDE_R_W10_U_BOTTOM_HEADER_WRP2: BH2.30 TH3.11@5253.54,2787.5 | length 672.5
  Top Layer w7: TH3.11@5253.54,2787.5 5327.5,2787.5 v1(5328,2788)
  Bottom Layer w7: BH2.30@4753.54,2787.5 4894,2787.5 4922.5,2816 5300,2816 v1(5328,2788)
OUTSIDE_R_W10_U_BOTTOM_HEADER_WRP3: BH3.30 TH5.11 | length 728.7
  Top Layer w7: v1(147,2659) 175.5,2687.5 TH5.11@221.46,2687.5
  Bottom Layer w7: v1(147,2659) 451,2659 493,2617 668,2617 702,2651 702,2687.5 BH3.30@721.46,2687.5
OUTSIDE_R_W10_U_BOTTOM_HEADER_WRP4: BH4.30 TH7.11 | length 513.7
  Top Layer w7: TH7.11@2687.5,4253.54 2687.5,4324.5 2704,4341 2704,4662.5 v1(2687.5,4679)
  Bottom Layer w7: v1(2687.5,4679) BH4.30@2687.5,4753.54
OUTSIDE_R_W11_U_BOTTOM_HEADER_WRP1: BH1.29 TH3.12@2887.5,221.46 | length 528.6
  Top Layer w7: TH3.12@2887.5,221.46 2887.5,392 2853,426.5 2853,612.5 v1(2887.5,647)
  Bottom Layer w7: v1(2887.5,647) BH1.29@2887.5,721.46
OUTSIDE_R_W11_U_BOTTOM_HEADER_WRP2: BH2.29 TH3.12@5253.54,2887.5 | length 545.1
  Top Layer w7: v1(5179,2887.5) TH3.12@5253.54,2887.5
  Bottom Layer w7: BH2.29@4753.54,2887.5 4859,2887.5 4913.5,2833 5124.5,2833 v1(5179,2887.5)
OUTSIDE_R_W11_U_BOTTOM_HEADER_WRP3: BH3.29 TH5.12 | length 500
  Top Layer w7: TH5.12@221.46,2587.5 v1(296,2587.5)
  Bottom Layer w7: v1(296,2587.5) BH3.29@721.46,2587.5
OUTSIDE_R_W11_U_BOTTOM_HEADER_WRP4: BH4.29 TH7.12 | length 689.2
  Top Layer w7: TH7.12@2587.5,4253.54 2616,4253.54 2616,4820 v1(2608,4828)
  Bottom Layer w7: BH4.29@2587.5,4753.54 2587.5,4801 2608,4821.5 v1(2608,4828)
OUTSIDE_R_W12_U_BOTTOM_HEADER_WRP1: BH1.28 TH3.13@2987.5,221.46 | length 717.1
  Top Layer w7: v1(2948,796) 3022,722 3022,472 2987.5,437.5 TH3.13@2987.5,221.46
  Bottom Layer w7: v1(2948,796) 2959.5,796 2987.5,768 BH1.28@2987.5,721.46
OUTSIDE_R_W12_U_BOTTOM_HEADER_WRP2: BH2.28 TH3.13@5253.54,2987.5 | length 649.3
  Top Layer w7: TH3.13@5253.54,2987.5 5327.5,2987.5 v1(5328,2988)
  Mid-Layer 1 w7: v1(4828,2987.5) 5327.5,2987.5 v1(5328,2988)
  Bottom Layer w7: BH2.28@4753.54,2987.5 v1(4828,2987.5)
OUTSIDE_R_W12_U_BOTTOM_HEADER_WRP3: BH3.28 TH5.13 | length 692.4
  Top Layer w7: v1(147,2487.5) TH5.13@221.46,2487.5
  Bottom Layer w7: v1(147,2487.5) 199.5,2540 594.5,2540 647,2487.5 BH3.28@721.46,2487.5
OUTSIDE_R_W12_U_BOTTOM_HEADER_WRP4: BH4.28 TH7.13 | length 787.4
  Top Layer w7: v1(2444,4163.5) 2487.5,4207 TH7.13@2487.5,4253.54
  Mid-Layer 2 w7: v1(2444,4163.5) 2358,4249.5 2358,4557 v1(2480,4679)
  Bottom Layer w7: v1(2480,4679) 2487.5,4686.5 BH4.28@2487.5,4753.54
OUTSIDE_R_W13_U_BOTTOM_HEADER_WRP1: BH1.27 TH3.14@3087.5,221.46 | length 528.6
  Top Layer w7: TH3.14@3087.5,221.46 3087.5,420.5 3053,455 3053,594.5 v1(3087.5,629)
  Bottom Layer w7: v1(3087.5,629) BH1.27@3087.5,721.46
OUTSIDE_R_W13_U_BOTTOM_HEADER_WRP2: BH2.27 TH3.14@5253.54,3087.5 | length 649.5
  Top Layer w7: v1(5179,3088) 5179.5,3087.5 TH3.14@5253.54,3087.5
  Mid-Layer 1 w7: v1(4679,3088) v1(5179,3088)
  Bottom Layer w7: v1(4679,3088) 4679.5,3087.5 BH2.27@4753.54,3087.5
OUTSIDE_R_W13_U_BOTTOM_HEADER_WRP3: BH3.27 TH5.14 | length 524.4
  Top Layer w7: TH5.14@221.46,2387.5 v1(296,2387.5)
  Bottom Layer w7: v1(296,2387.5) 325.5,2358 448,2358 477.5,2387.5 BH3.27@721.46,2387.5
OUTSIDE_R_W13_U_BOTTOM_HEADER_WRP4: BH4.27 TH7.14 | length 821.3
  Top Layer w7: TH7.14@2387.5,4253.54 2387.5,4327.5 v1(2388,4328)
  Mid-Layer 2 w7: v1(2388,4328) 2440,4328 2516,4404 2516,4788 v1(2476,4828)
  Bottom Layer w7: BH4.27@2387.5,4753.54 2387.5,4800 2415.5,4828 v1(2476,4828)
OUTSIDE_R_W14_U_BOTTOM_HEADER_WRP1: BH1.26 TH3.15@3187.5,221.46 | length 676.8
  Top Layer w7: TH3.15@3187.5,221.46 3187.5,404.5 3221,438 v1(3221,796)
  Bottom Layer w7: BH1.26@3187.5,721.46 3187.5,762.5 v1(3221,796)
OUTSIDE_R_W14_U_BOTTOM_HEADER_WRP2: BH2.26 TH3.15@5253.54,3187.5 | length 665.1
  Top Layer w7: TH3.15@5253.54,3187.5 5308.5,3187.5 v1(5328,3168)
  Mid-Layer 1 w7: v1(4828.5,3187.5) 4848,3168 v1(5328,3168)
  Bottom Layer w7: BH2.26@4753.54,3187.5 v1(4828.5,3187.5)
OUTSIDE_R_W14_U_BOTTOM_HEADER_WRP3: BH3.26 TH5.15 | length 675.8
  Top Layer w7: v1(147,2255) 179.5,2287.5 TH5.15@221.46,2287.5
  Mid-Layer 1 w7: v1(147,2255) 591.5,2255 v1(624,2287.5)
  Bottom Layer w7: v1(624,2287.5) BH3.26@721.46,2287.5
OUTSIDE_R_W14_U_BOTTOM_HEADER_WRP4: BH4.26 TH7.15 | length 524.4
  Top Layer w7: v1(2268,4679) 2258,4669 2258,4348.5 2287.5,4319 TH7.15@2287.5,4253.54
  Bottom Layer w7: v1(2268,4679) 2287.5,4698.5 BH4.26@2287.5,4753.54
OUTSIDE_R_W15_U_BOTTOM_HEADER_WRP1: BH1.25 TH3.16@3287.5,221.46 | length 548.2
  Top Layer w7: TH3.16@3287.5,221.46 3254,221.46 3253,222.46 3253,601.5 v1(3287.5,636)
  Bottom Layer w7: v1(3287.5,636) BH1.25@3287.5,721.46
OUTSIDE_R_W15_U_BOTTOM_HEADER_WRP2: BH2.25 TH3.16@5253.54,3287.5 | length 500.4
  Top Layer w7: v1(5179,3288) 5179.5,3287.5 TH3.16@5253.54,3287.5
  Bottom Layer w7: BH2.25@4753.54,3287.5 5178.5,3287.5 v1(5179,3288)
OUTSIDE_R_W15_U_BOTTOM_HEADER_WRP3: BH3.25 TH5.16 | length 500
  Top Layer w7: TH5.16@221.46,2187.5 v1(296,2187.5)
  Bottom Layer w7: v1(296,2187.5) BH3.25@721.46,2187.5
OUTSIDE_R_W15_U_BOTTOM_HEADER_WRP4: BH4.25 TH7.16 | length 656.4
  Top Layer w7: v1(2187,4828) 2196,4819 2196,4281.5 2187.5,4273 TH7.16@2187.5,4253.54
  Bottom Layer w7: v1(2187,4828) 2187.5,4827.5 BH4.25@2187.5,4753.54
SER0: OB15.DS OB16.Q | length 2003.1
  Mid-Layer 2 w7: v1(4629,4976) 4546,5059 4477,5059 4419,5117 4220,5117 4199,5138 4199,5185 4240,5226 4658,5226 4750,5134 5052,5134 v1(5062,5124)
  Bottom Layer w7: v1(4629,4976) 4654,4951 4654,4916.57 OB16.Q@4691.14,4916.57 ; OB15.DS@4691.14,5186.61 4755.61,5186.61 4795.5,5226.5 4959.5,5226.5 v1(5062,5124)
SER1: OB14.DS OB15.Q | length 3090.8
  Bottom Layer w7: OB14.DS@4691.14,3989.61 4640,3989.61 4565.5,3915.11 4565.5,3840 4642,3763.5 4966.22,3763.5 5369.5,4166.78 5369.5,4813.5 5177,5006 5030.32,5006 4992.23,5044.08 4612.92,5044.08 4575,5082 4575,5238.24 4651.33,5314.57 OB15.Q@4691.14,5314.57
SER2: OB13.DS OB14.Q | length 825.3
  Bottom Layer w7: OB14.Q@4691.14,4117.57 4722,4117.57 4722,4160 4753,4191 4778,4191 4849.5,4119.5 4969.07,4119.5 4983,4133.43 4983,4222 4832.39,4372.61 OB13.DS@4691.14,4372.61
SER3: OB12.DS OB13.Q | length 4017
  Bottom Layer w7: OB12.DS@1481.39,4691.14 1481.39,4660 1492.39,4649 1601.81,4649 1759.81,4807 1831,4807 1853,4785 1853,4361 1920,4294 3991,4294 4048,4237 4543,4237 4561.01,4255.01 4561.01,4408.3 4573,4420.29 4573,4459 4614.57,4500.57 OB13.Q@4691.14,4500.57
SER4: OB11.DS OB12.Q | length 394.8
  Bottom Layer w7: OB11.DS@1082.39,4691.14 1082.39,4659.61 1138.5,4603.5 1321.5,4603.5 1353.43,4635.43 OB12.Q@1353.43,4691.14
SER5: OB10.DS OB11.Q | length 347.6
  Bottom Layer w7: OB10.DS@684.39,4691.14 684.39,4720 698.39,4734 774,4734 784,4744 930.43,4744 954.43,4720 OB11.Q@954.43,4691.14
SER6: OB9.DS OB10.Q | length 1050.2
  Bottom Layer w7: OB9.DS@287.39,4691.14 283,4725 283,4769 298,4784 319,4784 350,4815 350,4899.5 361.5,4911 421,4911 496.76,4835.24 685.56,4835.24 702.32,4852 759,4852 774,4837 774,4806 757.43,4789.43 600,4789.43 556.43,4745.86 OB10.Q@556.43,4691.14
SER7: OB8.DS OB9.Q | length 9197.2
  Mid-Layer 2 w7: v1(81,4481) 80,4481 52,4453 52,3993.5 69,3976.5 69,1110 225,954 225,361.68 547.68,39 1417,39 1442,64 1442,304.5 1430,316.5 1430,389 1461,420 1461,600.91 1429.7,632.2 1429.7,743.7 1456,770 1710,770 v1(1736,796)
  Bottom Layer w7: v1(81,4481) 96,4496 96,4640 OB9.Q@159.43,4691.14 ; v1(1736,796) 1805,865 3511.5,865 3522.5,876 3816,876 3826,886 3914.04,886 3986.61,813.43 OB8.DS@3986.61,783.86
SER8: OB7.DS OB8.Q | length 1687.5
  Mid-Layer 2 w7: v1(4494,708) 4482,720 4482,914 v1(4514,946)
  Bottom Layer w7: OB8.Q@4114.57,783.86 4114.57,823.13 4154.13,823.13 4243,912 4243,1066 4223,1086 4223,1200 4297,1274 4544,1274 4607,1211 4607,999 4554,946 v1(4514,946) ; OB7.DS@4386.61,783.86 4386.61,743 4421.61,708 v1(4494,708)
SER9: OB6.DS OB7.Q | length 633.8
  Top Layer w7: v1(4521.5,860.07) 4521.5,844.5 v1(4652,714)
  Bottom Layer w7: OB7.Q@4514.57,783.86 4514.57,853.14 v1(4521.5,860.07) ; v1(4652,714) 4652,648.5 4692,608.5 4722.04,608.5 4787.61,674.07 OB6.DS@4787.61,783.86
SER10: OB5.DS OB6.Q | length 1212.5
  Mid-Layer 2 w7: v1(4953,663) 4953,741 v1(4959,747)
  Bottom Layer w7: OB6.Q@4915.57,783.86 4915.57,755 4951,755 v1(4959,747) ; v1(4953,663) 4953,580 4941,568 4913,568 4840,495 4840,465 4852,453 4970.5,453 5037.5,520 5037.5,602.5 5043,608 5043,749 5056,762 5083.7,762 5145,700.7 5145,685.48 5160.48,670 5189.52,670 5202.52,683 5202.52,714.48 5179.61,737.39 OB5.DS@5179.61,783.86
SER11: OB4.DS OB5.Q | length 6567.3
  Bottom Layer w7: OB4.DS@783.86,1483.39 737,1483.39 707,1513.39 707,1672 726,1691 1222,1691 1323,1590 1509,1590 1559,1540 1559,1503 1600,1462 1764,1462 1786,1484 2417,1484 2533,1368 2933,1368 2981,1320 5417,1320 5450,1287 5450,480 5410,440 5369.75,440 5334.82,474.93 5268.59,474.93 5253.52,490 5253.52,697.52 5275.85,719.85 5307.57,740 OB5.Q@5307.57,783.86
SER12: OB3.DS OB4.Q | length 2480.8
  Bottom Layer w7: OB3.DS@783.86,1083.39 713.61,1078 680,1078 643,1041 643,546.5 599.5,503 384,503 134.93,752.07 134.93,1235.93 200,1301 757,1301 780,1324 780,1355.43 OB4.Q@783.86,1355.43
SER13: OB2.DS OB3.Q | length 727.5
  Mid-Layer 1 w7: v1(861,791) 807,737 785,737 761,761 761,795 817,851 v1(919,851)
  Bottom Layer w7: OB2.DS@783.86,683.39 828.39,683.39 861,716 v1(861,791) ; OB3.Q@783.86,955.43 876,955.43 909,922.43 909,861 v1(919,851)
SER14: OB1.DS OB2.Q | length 900.3
  Bottom Layer w7: OB1.DS@783.86,283.39 750,283.39 712.39,321 677,321 666,298 650,282 560,282 462,380 462,420 492,450 760,450 808.9,498.9 808.9,555.43 OB2.Q@783.86,555.43
pads on no net: S1.NC1 S1.NC2 S1.NC3 S2.NC1 S2.NC2 S2.NC3 S3.NC1 S3.NC2 S3.NC3 S4.NC1 S4.NC2 S4.NC3 S5.NC1 S5.NC2 S5.NC3 S6.NC1 S6.NC2 S6.NC3 S7.NC1 S7.NC2 S7.NC3 S8.NC1 S8.NC2 S8.NC3 ZIF.129 ZIF.130 ZIF.131 ZIF.132 ZIF.133 ZIF.134 ZIF.135 ZIF.136 ZIF.137 ZIF.138 ZIF.139 ZIF.140 ZIF.141 ZIF.142 ZIF.143 ZIF.144 ZIF.145 ZIF.146 ZIF.147 ZIF.148 ZIF.149 ZIF.150 ZIF.151 ZIF.152 ZIF.153 ZIF.154 ZIF.155 ZIF.156 ZIF.157 ZIF.158 ZIF.159 ZIF.160 ZIF.161 ZIF.162 ZIF.163 ZIF.164 ZIF.165 ZIF.166 ZIF.167 ZIF.168 ZIF.169

## Silkscreen, mask and mechanical layers (free items; w line width, h text height)
Mechanical 3:
  the board outline again, w10